# Altium PCB IR.PcbDoc
Units mm, origin at the board's own origin, x right, y up, seen from the top; angles counter-clockwise.
Board outline 152.4 x 101.6 mm, 2 copper layers (Top Layer, Bottom Layer); 4 components, 2 nets, 10 pads, 0 vias.
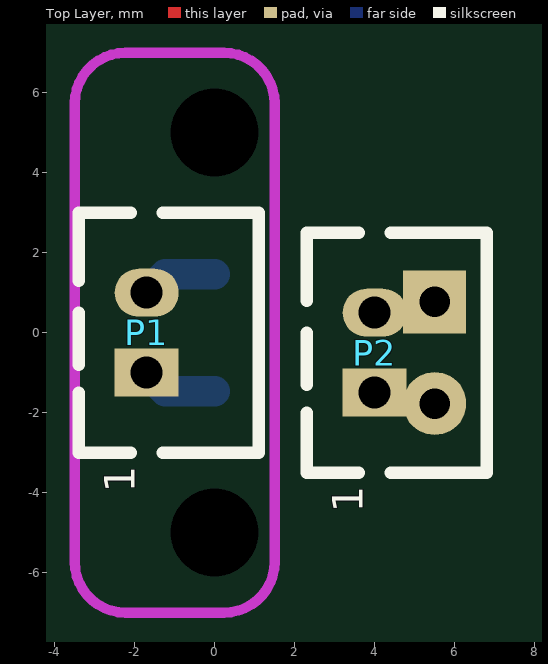
[diagram p0: Top Layer view]
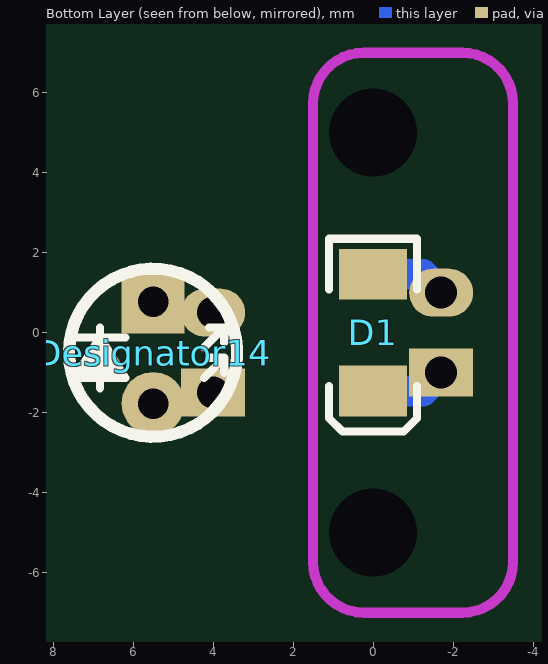
[diagram p1: Bottom Layer view, seen from below]

## Layer stack, top to bottom
Top Solder: solder mask 0.0102, Solder Resist, Dk 3.5
Top Layer: signal copper 0.0356
Dielectric 1: dielectric 0.32, FR-4, Dk 4.8
Bottom Layer: signal copper 0.0356
Bottom Solder: solder mask 0.0102, Solder Resist, Dk 3.5

## Board outline
-64.889,-42.656 87.511,-42.656 87.511,58.944 -64.889,58.944

## Design rules (kind name [scope] priority, off if disabled: settings)
Clearance [All] p1: gap=0.254
PolygonConnect [All] p1: connectstyle=Relief reliefconductorwidth=0.254 reliefentries=4 polygonreliefangle="90 Angle" airgapwidth=0.254
RoutingVias [All] p1: holewidth=0.711 width=1.27 viastyle="Through Hole" minholewidth=0.711 minwidth=1.27 maxholewidth=0.711 maxwidth=1.27
SolderMaskExpansion [All] p1: expansion=0.102
Width [All] p1: maxlimit=0.762 minlimit=0.254 preferedwidth=0.254 minimp=50.000000 maximp=50.000000 favimp=50.000000
30 further rules are at their usual default settings.

## Components (designator, comment, footprint, x,y, rotation, side; value= is the part's Value field where it differs from the comment)
D1 "Comment" LED1206 0,0 r270 bottom
Designator14 "Comment" LED3 5.5,-0.5 r270 bottom
P1 "Comment" PH-2Y -1.7,-1 r90 top
P2 "Comment" PH-2Y 4,-1.5 r90 top

## Footprints (in the part's own frame and the unit in brackets; to place one, negate y for a bottom-side part, rotate by r counter-clockwise, add the part's x,y. Pads: shape width x height; smd on the part's side, far side on the other; paste and mask are expansions set on the pad)
LED3 [mil]
  round 62 hole 30: 1(50,0)
  rect 62x62 hole 30: 2(-50,0)
  silkscreen extent -83,-83 83,83
LED1206 [mm] "Chip Capacitor, Body 3.2x1.6mm, IPC High Density"
  rect 1.27x1.7 smd: 1(-1.46,0) 2(1.46,0)
  silkscreen extent -2.35,-1.1 2.47,1.1, body extent -1.68,-0.9 1.72,0.9, height 1.3
PH-2Y [mm]
  rect 1.2x1.6 hole 0.8: 1(0,0)
  oval 1.2x1.6 hole 0.8: 2(2,0)
  silkscreen extent -2,-2.8 4,1.7

## Free pads (board coordinates)
  round 0 hole 2.2: 0(0,-5) 0(0,5)

## Nets (pads, with @x,y where several pads share a name; then routed paths per layer and width w, separated by ;. In a path a pad name is that pad's centre, name@x,y a point inside that pad or via, vN(x,y) a via of type N, cw(c..) or ccw(c..) an arc to the next point about the centre after c; other vN are vias at no path point)
LEDA: D1.1 P1.2 | length 1.9
  Bottom Layer w0.762: P1.2 -1.239,1.46 D1.1
LEDK: D1.2 P1.1 | length 1.9
  Bottom Layer w0.762: P1.1 -1.239,-1.46 D1.2
pads on no net: Designator14.1 Designator14.2 P2.1 P2.2

## Keep-outs
Keep-Out Layer:
  lines w0.254: -3.5,-5.73 ccw(c-2.23,-5.73) -2.23,-7 0.23,-7 ccw(c0.23,-5.73) 1.5,-5.73 1.5,5.73 ccw(c0.23,5.73) 0.23,7 -2.23,7 ccw(c-2.23,5.73) -3.5,5.73 -3.5,-5.73

## Text inside footprints (layer, text, board x,y; h text height)
P1: Top Overlay "1" at -2,-4 h0.76 r90
P2: Top Overlay "1" at 3.7,-4.5 h0.76 r90